# Altium PCB DIOT_EEM_Adapter.pcbdoc (part 1 of 2)
Units mil, origin at the board's own origin, x right, y up, seen from the top; angles counter-clockwise.
Board outline 3439.52 x 3937.01 mil, 6 copper layers (TopLayer, MidLayer1, MidLayer2, SignalLayer1, Internal Plane 1, BottomLayer), stack 60.157 mil thick; 45 components, 66 nets, 409 pads, 76 vias.
Unrouted connection lines stored in the file: 1.
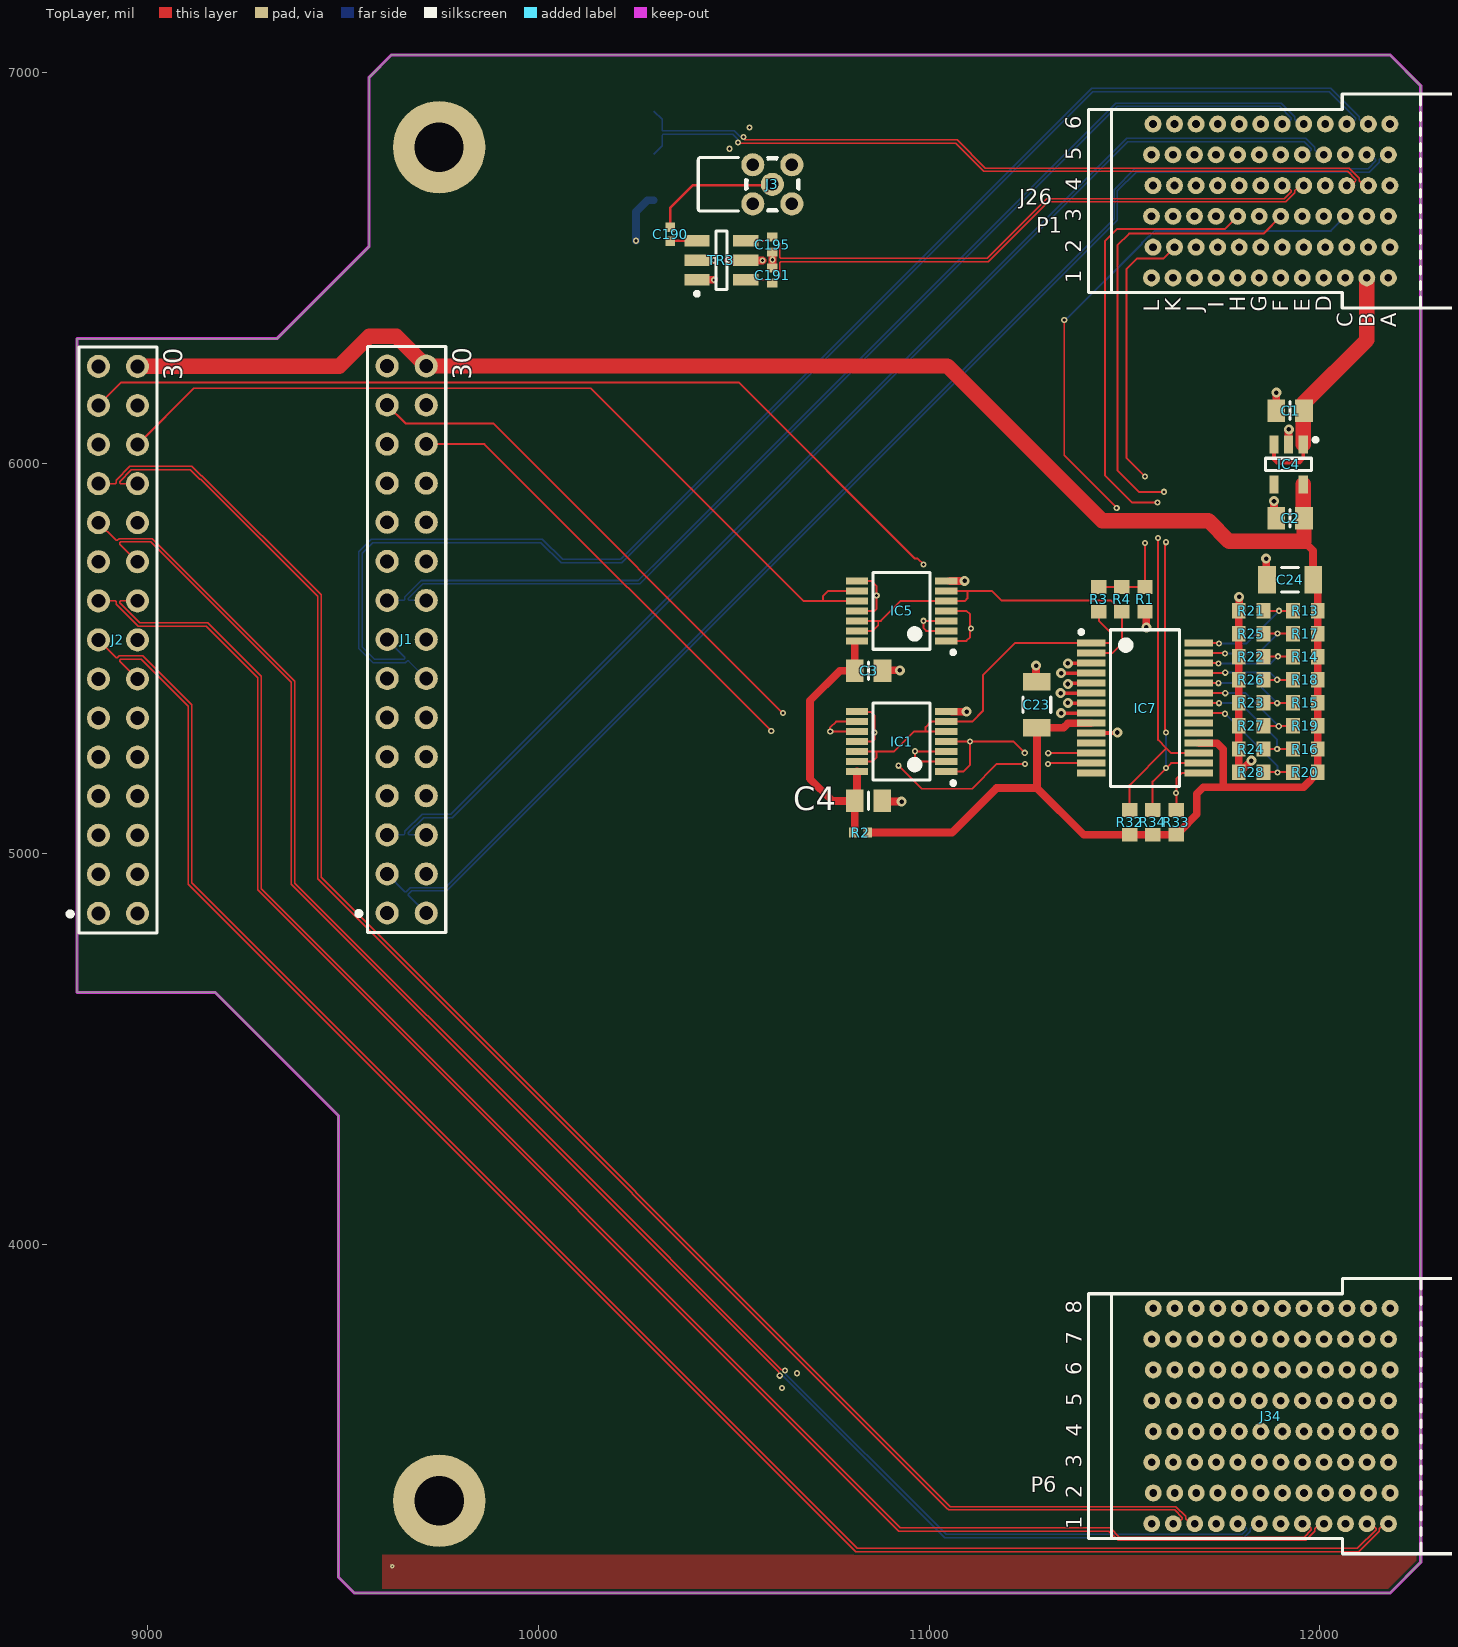
[diagram p0: TopLayer view]
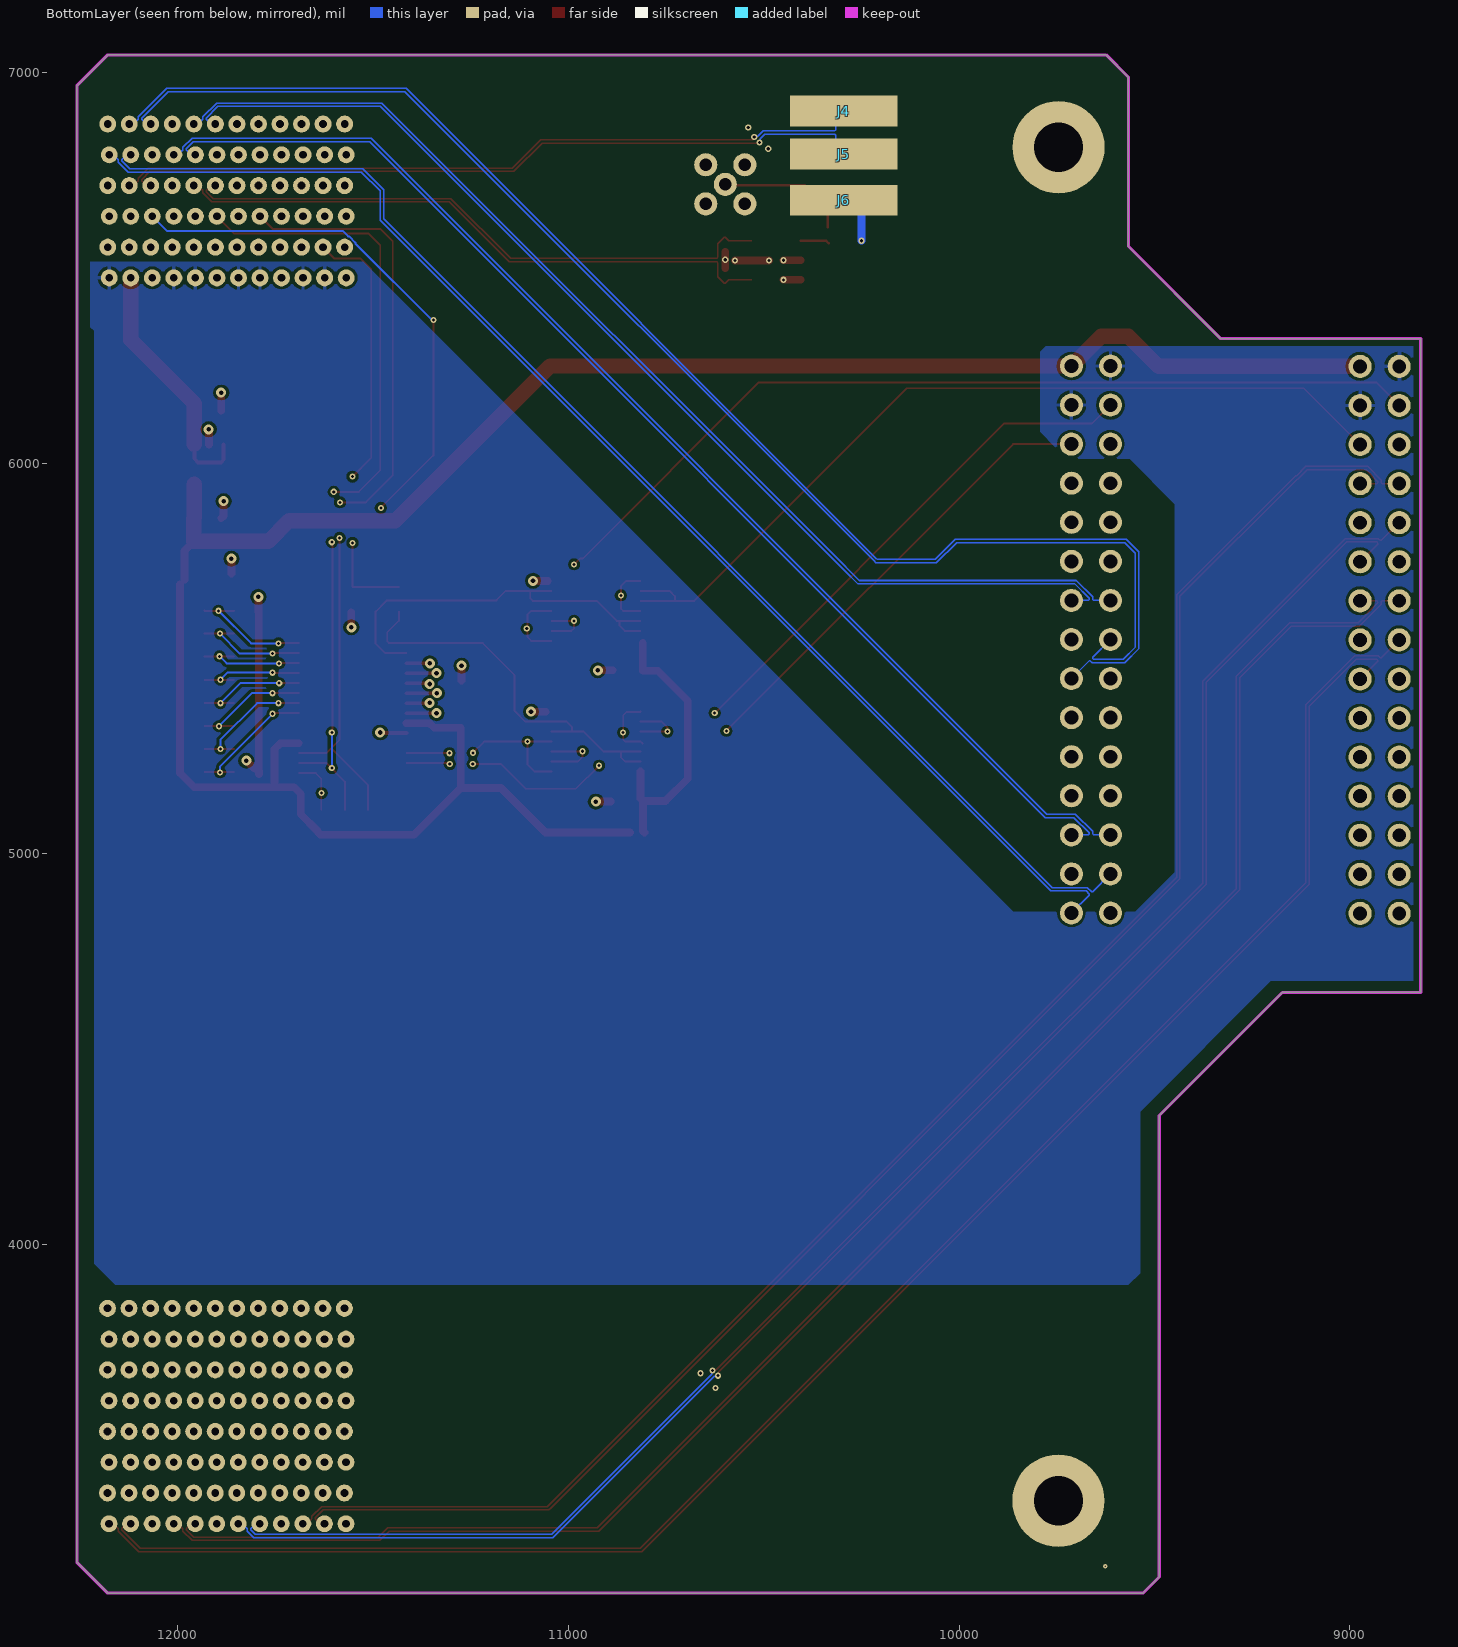
[diagram p1: BottomLayer view, seen from below]
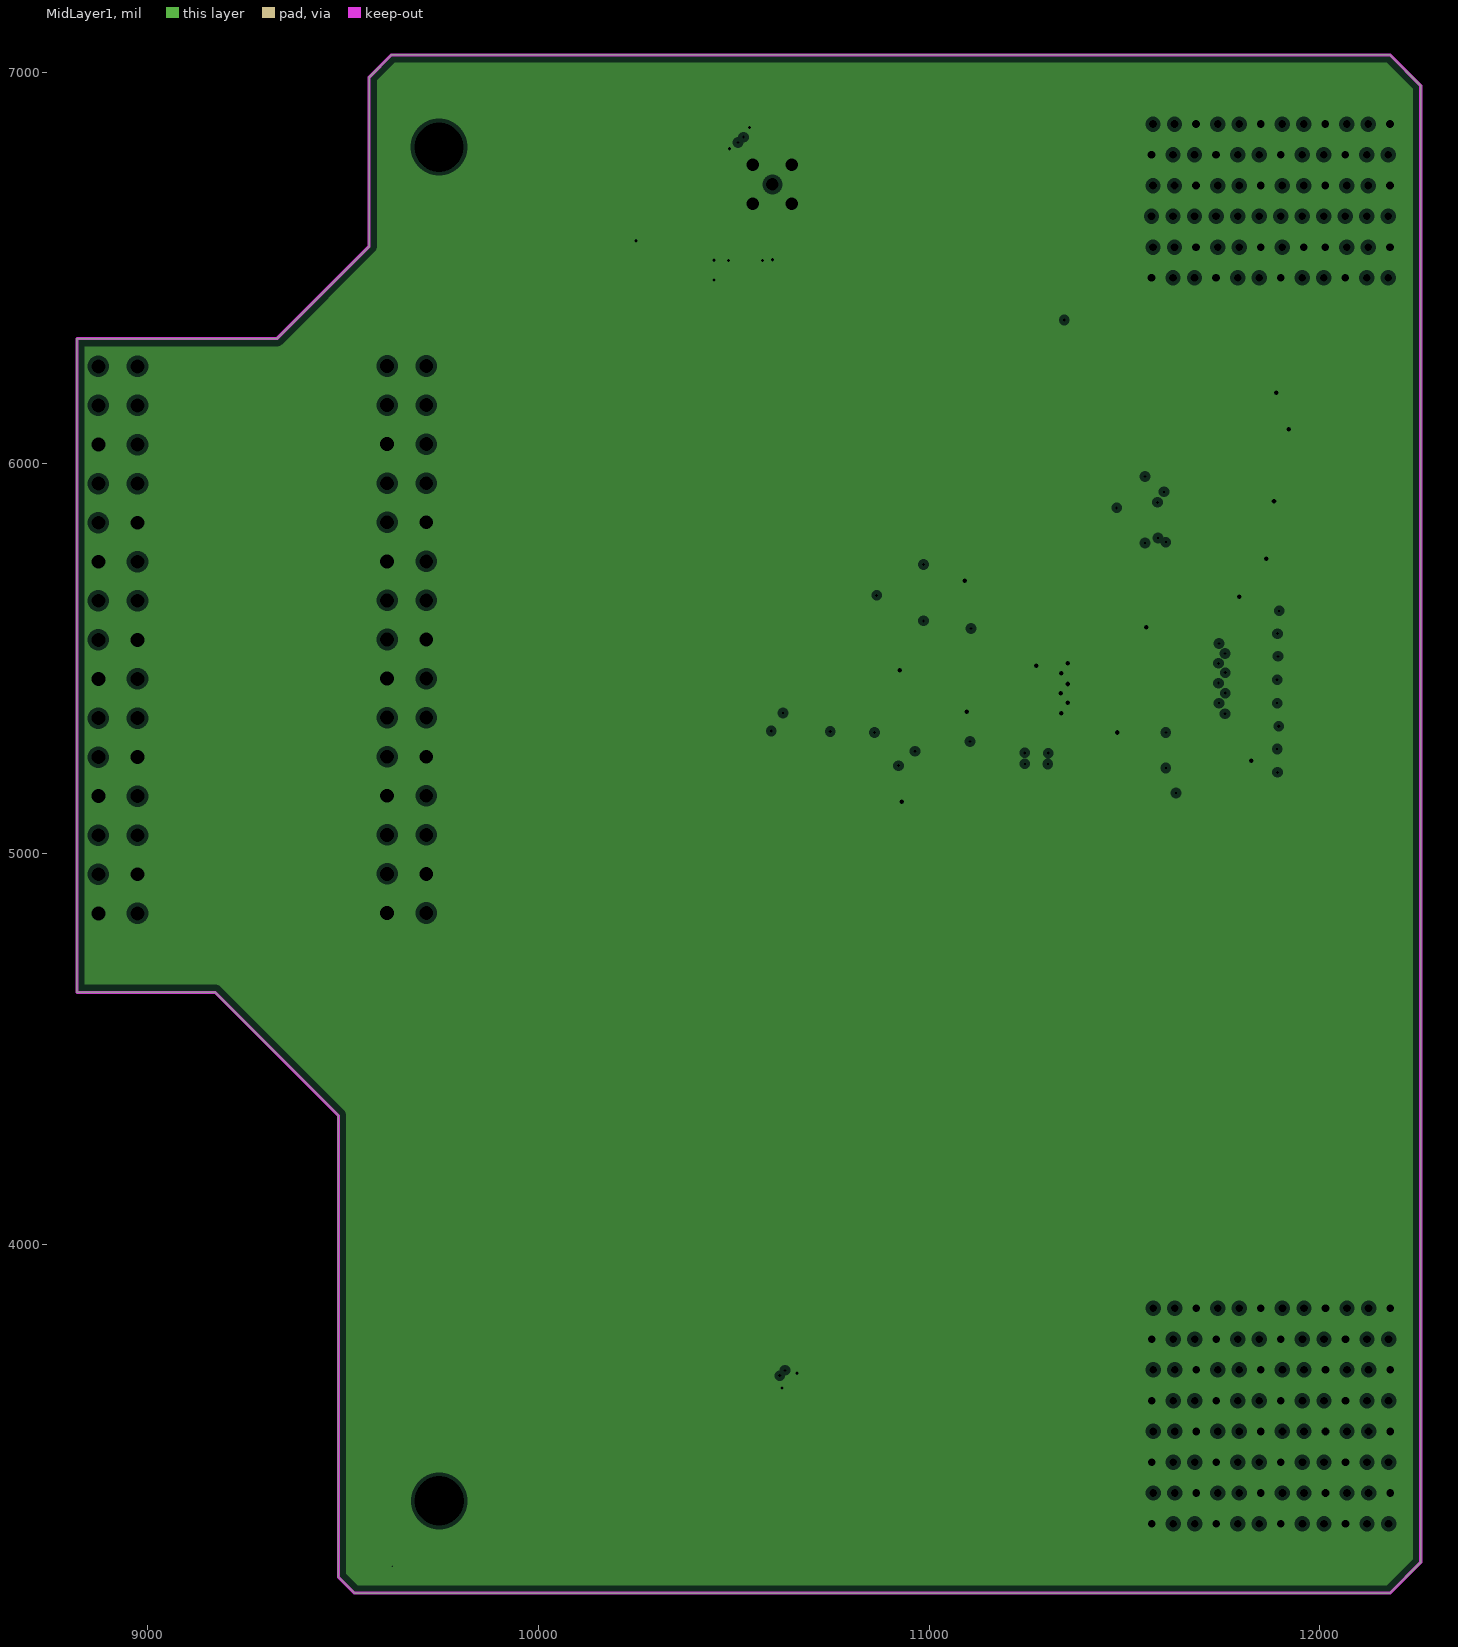
[diagram p2: MidLayer1, clearances drawn from the general rule]
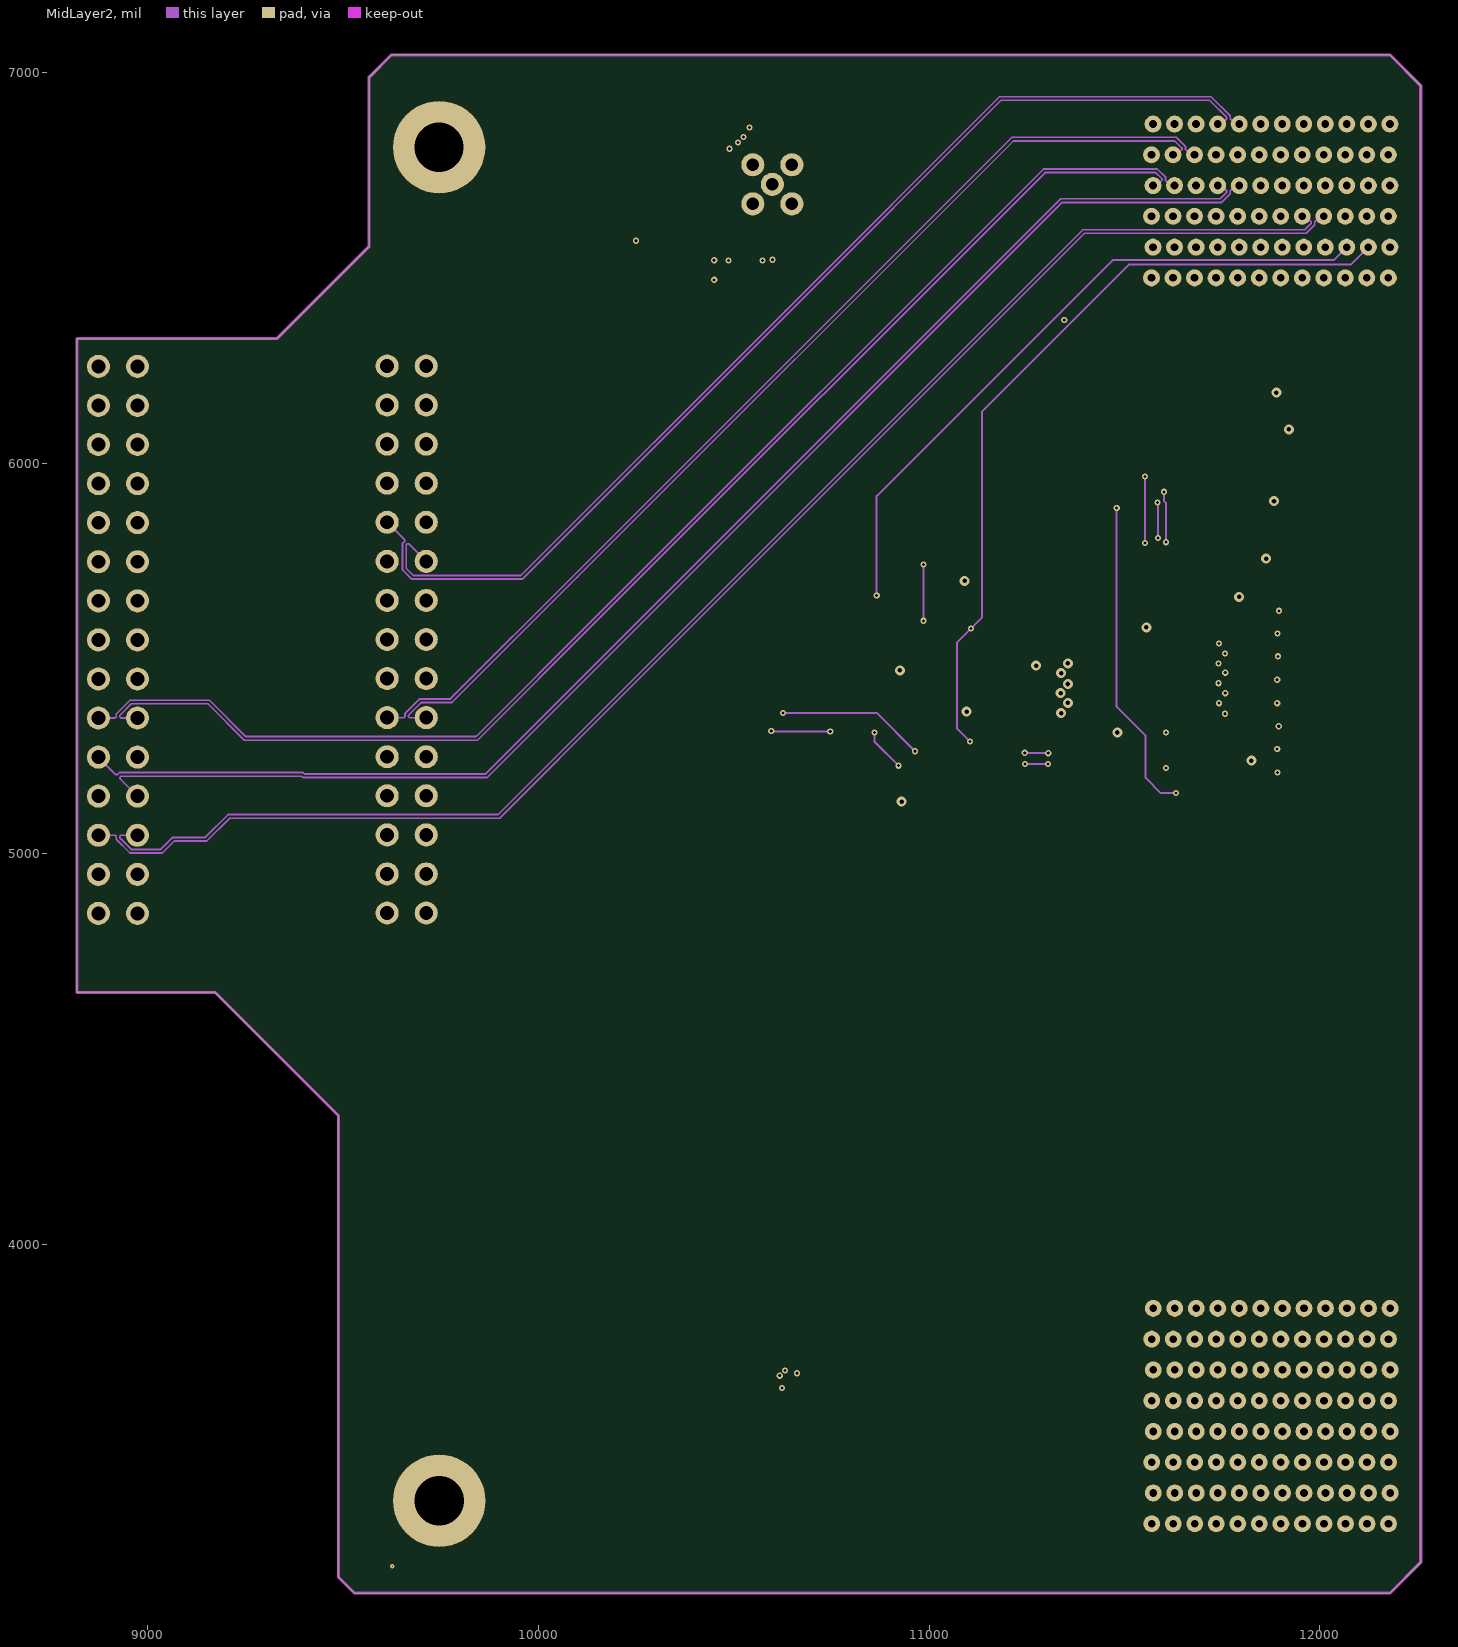
[diagram p3: MidLayer2]
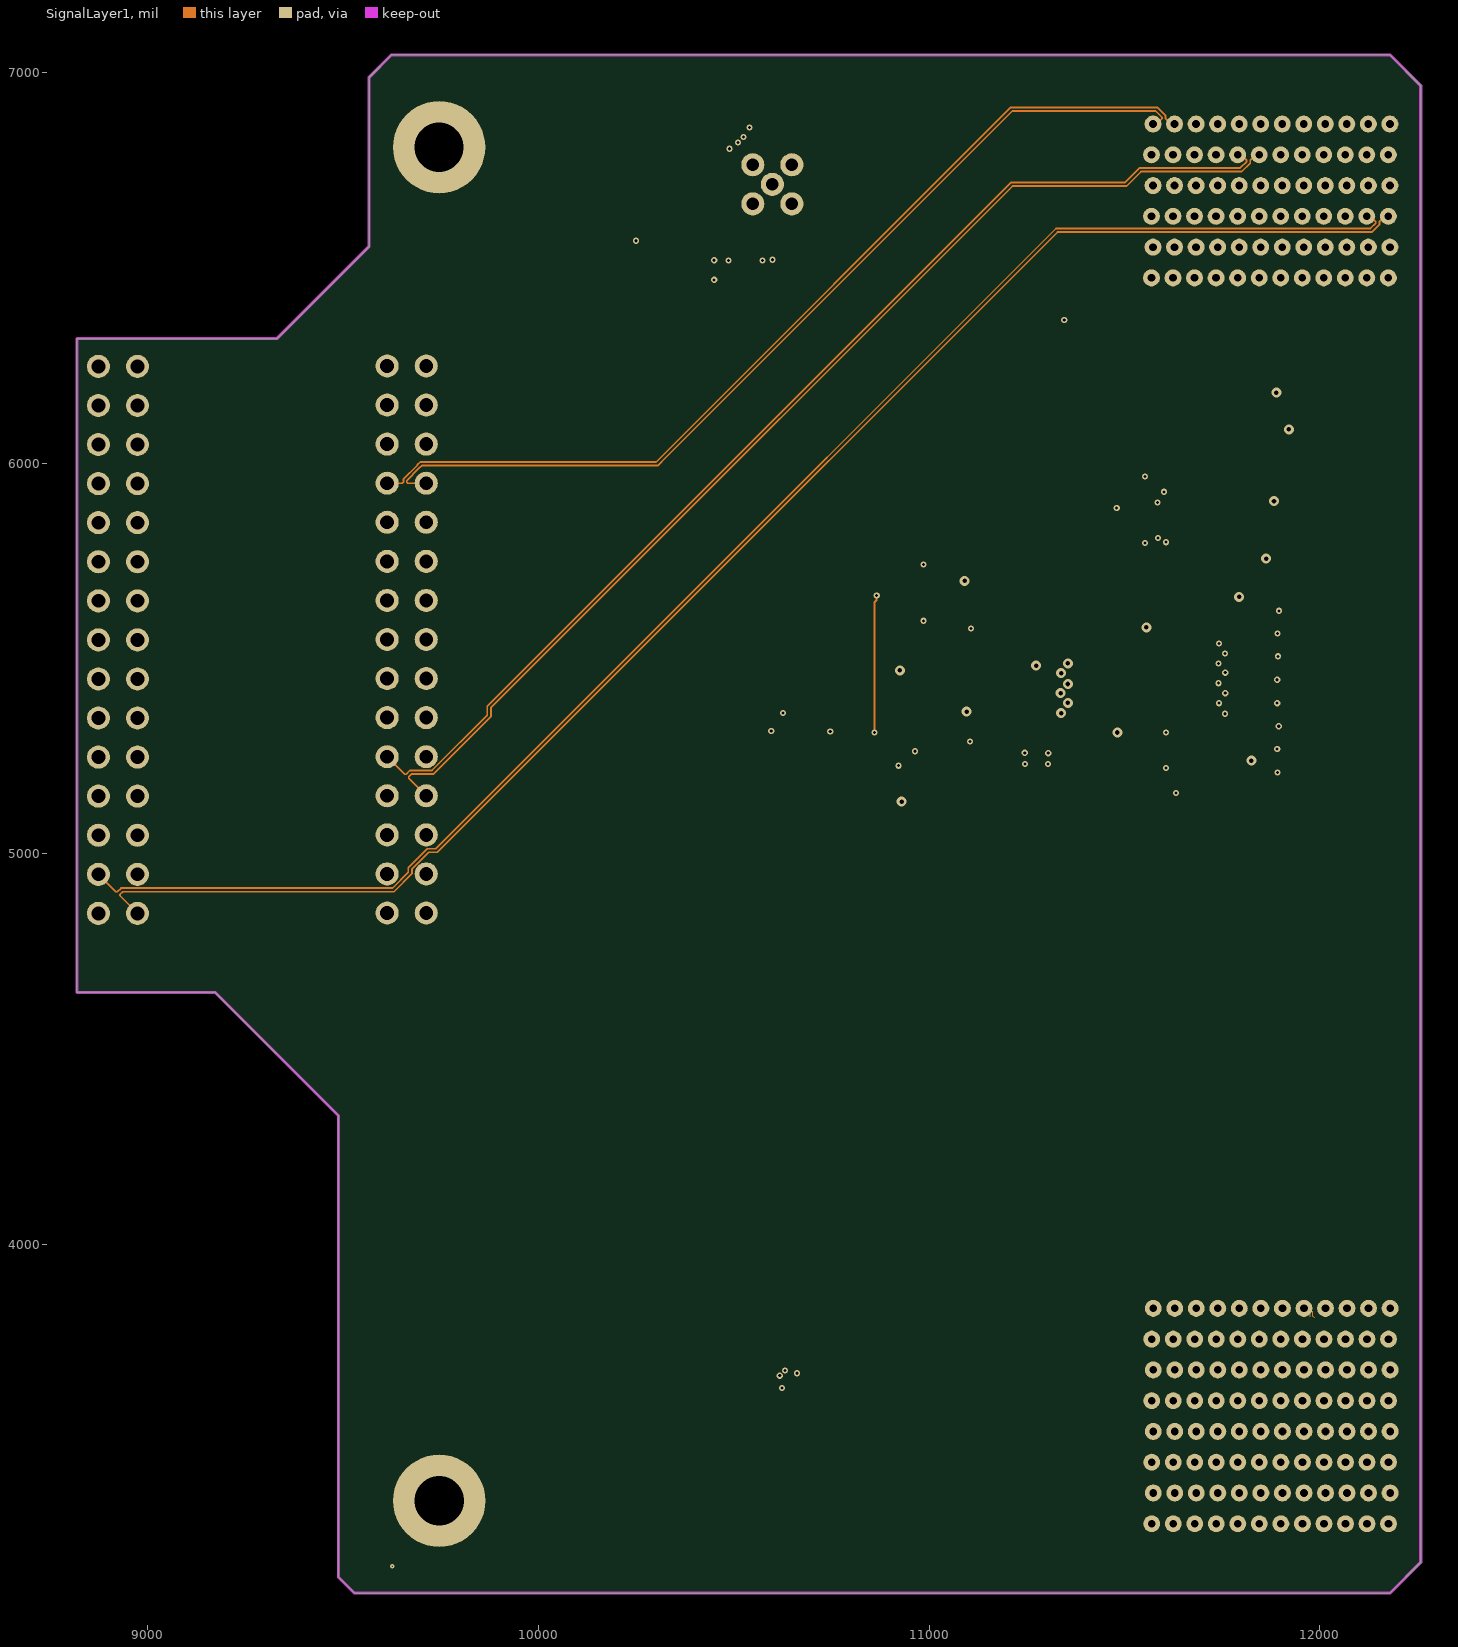
[diagram p4: SignalLayer1]
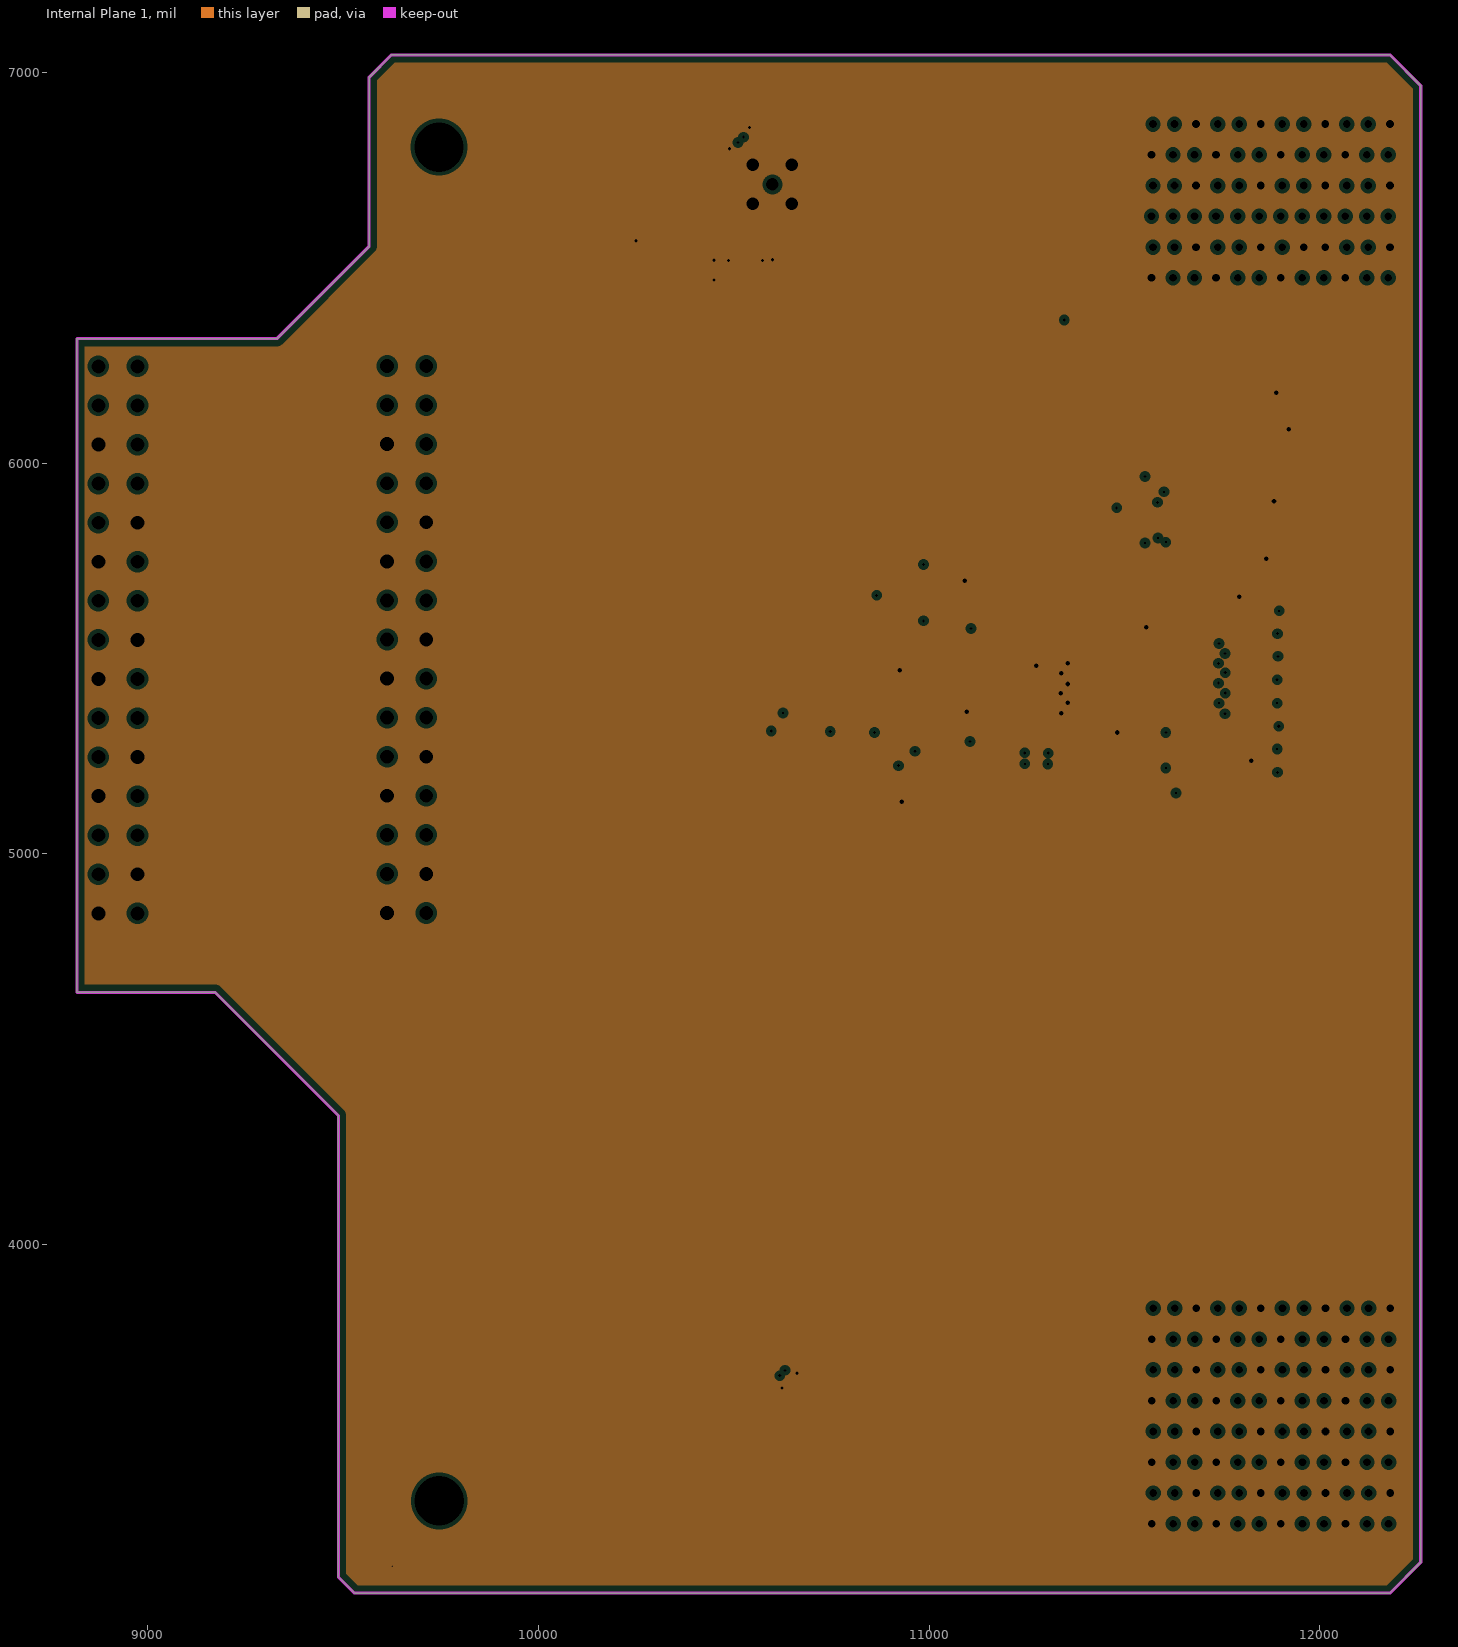
[diagram p5: Internal Plane 1, clearances drawn from the general rule]
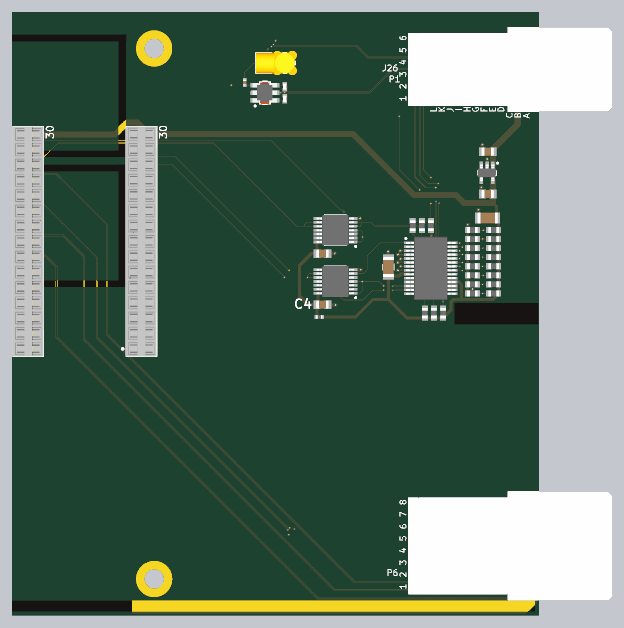
[diagram p7: 3D render of the assembled board from above, using the file's embedded part models]

## Layer stack, top to bottom
TopSolder: solder mask 0.8858, Solder Resist, Dk 3.5
TopLayer: signal copper 2.0865
Dielectric1: core 4.3307, FR-4, Dk 4.2
MidLayer1: plane copper 0.7087, net GND
Dielectric2: prepreg 7.874, FR-4, Dk 4.2
MidLayer2: signal copper 0.7087
Dielectric3: core 28.7402, FR-4, Dk 4.2
SignalLayer1: signal copper 0.7087
Dielectric4: prepreg 7.874, FR-4, Dk 4.2
Internal Plane 1: plane copper 0.7087, net GND
Dielectric5: core 4.3307, FR-4, Dk 4.2
BottomLayer: signal copper 2.0865
BottomSolder: solder mask 0.8858, Solder Resist, Dk 3.5

## Board outline
9173.23,4645.67 9488.19,4330.71 9488.19,3149.61 9529.53,3108.27 12179.69,3108.27 12179.67,3108.27 12258.4,3187 12258.41,3187.01 12258.41,6966.55 12179.69,7045.28 9624.02,7045.28 9566.93,6988.19 9566.93,6555.12 9330.71,6318.9 8818.9,6318.9 8818.9,4645.67

## Design rules (kind name [scope] priority, off if disabled: settings)
Clearance Clearance_NT [InComponent('NT*')] p1: gap=0 ignorepadtopadclearanceinfootprint=TRUE
Clearance Clearance_Poly [InPoly] p2: gap=7.09 ignorepadtopadclearanceinfootprint=FALSE
Clearance [All vs not HasFootprint('Net Tie')] p3: gap=3.54 ignorepadtopadclearanceinfootprint=FALSE except(0: Arc-Hole Track-Hole SMDPad-Hole THPad-Hole Via-Hole Fill-Hole Poly-Hole Region-Hole Text-Hole)
ComponentClearance ComponentClearance_pressfit [HasCompParameterValue('PressFit','Yes') vs InComponent('No Component')] p1: gap=196.85 collisioncheckmode=3 verticalgap=10 showdistances=FALSE
ComponentClearance ComponentClearance_NM [InComponentClass('NotMounted')] p2: gap=0 collisioncheckmode=3 verticalgap=0 showdistances=FALSE
ComponentClearance ComponentClearance_Top [not InComponentClass('Overlapping') and InComponentClass('Top Side Components') vs InComponentClass('Top Side Components')] p3: gap=0 collisioncheckmode=3 verticalgap=100000 showdistances=FALSE
ComponentClearance Overlapping [InComponentClass('Overlapping') vs InComponentClass('Overlapping')] p4: gap=0 collisioncheckmode=3 verticalgap=0 showdistances=FALSE
DiffPairsRouting [InDifferentialPairClass('All Differential Pairs')] p1: maxlimit=7.87 minlimit=3.94 mostfreqgap=4.92 toplayer_mingap=4.92 toplayer_minwidth=3.74 toplayer_maxwidth=4.92 toplayer_prefwidth=3.74 midlayer1_maxgap=4.72 midlayer1_prefgap=4.72 midlayer1_minwidth=3.15 midlayer1_maxwidth=4.53 midlayer1_prefwidth=4.53 midlayer3_maxgap=4.72 midlayer3_prefgap=4.72 midlayer3_minwidth=3.15 midlayer3_maxwidth=4.53 midlayer3_prefwidth=4.53 bottomlayer_mingap=4.92 bottomlayer_minwidth=3.74 bottomlayer_maxwidth=3.94 bottomlayer_prefwidth=3.74 impedanceprofiledriven=TRUE impedanceprofileid={E1CB4566-9A8A-4D03-A74A-23AC336A8A6D} impedanceprofilevalue=100.000000 maxuncoupledlength=1968.5
FabricationTestPointUsage TestPointUsage [All] p1: valid=0 allowmultiple=FALSE
FabricationTestpoint Testpoint [All] p1: side=3 testpointundercomponent=TRUE minsize=40 maxsize=100 preferedsize=60 minholesize=0 maxholesize=40 preferedholesize=32.01 testpointgrid=0.98 allowsidetop=TRUE allowsidebottom=TRUE usegrid=TRUE gridtolerance=0.01
Height [All] p1: minheight=0 maxheight=984.25 prefheight=393.7
HoleSize [All] p1: absolutevalues=TRUE maxlimit=196.85 minlimit=7.87 maxpercent=80.000 minpercent=20.000
HoleToHoleClearance [All] p1: gap=7.87 allowstackedmicrovias=TRUE
Length "Length CPCIs2a + XS" [InNetClass('CPCIs2a') or InxSignalClass('CPCIs2 XS')] p1: maxlimit=4960.63 minlimit=4763.78
Length "Length CPCIs5a + XS" [InNetClass('CPCIs5a')    or InxSignalClass('CPCIs5 XS')] p2: maxlimit=6106.3 minlimit=5944.88
MatchedLengths DiffPair_gbtclkm2c_MatchedLengths [InDifferentialPair ('FMCGBTCLKM2C_C1') Or InDifferentialPair ('FMCGBTCLKM2C_C0')] p1: tolerance=196.85 checknetsindiffpair=FALSE checkdiffpairvsdiffpair=TRUE checkxsignals=TRUE checkothers=TRUE
MatchedLengths DiffPair_gbtxClockDes_MatchedLengths [InDifferentialPair ('GBTXCLOCKDES_N0') Or InDifferentialPair ('GBTXCLOCKDES_P0') Or InDifferentialPair ('GBTXCLOCKDES_N1') Or InDifferentialPair ('GBTXCLOCKDES_P1')Or InDifferentialPair ('GBTXCLOCKDES_N2') Or InDifferentialPair ('GBTXCLOCKDES_P2')Or InDifferentialPair ('GBTXCLOCKDES_N3') Or InDifferentialPair ('GBTXCLOCKDES_P3') Or InDifferentialPair ('GBTXCLOCKDES_N4') Or InDifferentialPair ('GBTXCLOCKDES_P4')] p2: tolerance=196.85 checknetsindiffpair=FALSE checkdiffpairvsdiffpair=TRUE checkxsignals=TRUE checkothers=TRUE
MatchedLengths DiffPair_Scout_ScclkMatchedLengths [InDifferentialPair ('GBTXELINKSSCCLK') Or InDifferentialPair ('GBTXELINKSSCOUT')] p3: tolerance=196.85 checknetsindiffpair=FALSE checkdiffpairvsdiffpair=TRUE checkxsignals=TRUE checkothers=TRUE
MinimumAnnularRing MinimumAnnularRing_Via [IsVia] p1: minimumring=4.72
MinimumAnnularRing [All] p2: minimumring=7.8
MinimumSolderMaskSliver [IsThruPin vs IsThruPin] p1: minsoldermaskwidth=0
NetAntennae [All] p1 off: netantennaetolerance=0
PermittedLayers [All] p1: toplayerpermitted=TRUE bottomlayerpermitted=FALSE
PlaneClearance [All] p1: clearance=9.84
PlaneConnect PlaneConnect_ft_pcbm [InPadClass('ft_pcbm')] p1: planeconnectstyle=Relief reliefexpansion=9.84 reliefentries=4 reliefconductorwidth=7.87 reliefairgap=7.87
PlaneConnect PlaneConnect_Vias [IsVia or InPadClass('Direct')] p2: planeconnectstyle=Direct reliefexpansion=20 reliefentries=4 reliefconductorwidth=10 reliefairgap=10
PlaneConnect "PlaneConnect_0 > 0.5" [AsMM(HoleDiameter)<0.5] p3: planeconnectstyle=Relief reliefexpansion=11.81 reliefentries=4 reliefconductorwidth=7.87 reliefairgap=7.87
PlaneConnect "PlaneConnect_0.5 > 1" [(AsMM(HoleDiameter)>=0.5) and (AsMM(HoleDiameter)<1)] p4: planeconnectstyle=Relief reliefexpansion=11.81 reliefentries=4 reliefconductorwidth=9.84 reliefairgap=7.87
PlaneConnect "PlaneConnect_1 > 1.5" [(AsMM(HoleDiameter)>=1) and (AsMM(HoleDiameter)<1.5)] p5: planeconnectstyle=Relief reliefexpansion=11.81 reliefentries=4 reliefconductorwidth=11.81 reliefairgap=7.87
PlaneConnect "PlaneConnect_1.5 > 2" [(AsMM(HoleDiameter)>=1.5) and (AsMM(HoleDiameter)<2)] p6: planeconnectstyle=Relief reliefexpansion=11.81 reliefentries=4 reliefconductorwidth=15.75 reliefairgap=7.87
PlaneConnect [All] p7: planeconnectstyle=Relief reliefexpansion=11.81 reliefentries=4 reliefconductorwidth=19.68 reliefairgap=7.87
PolygonConnect PolygonConnect_Vias [IsVia or InPadClass('Direct') or InNetClass('ESD_STRIP')] p1: connectstyle=Direct reliefconductorwidth=10 reliefentries=4 polygonreliefangle="90 Angle" airgapwidth=10
PolygonConnect "PolygonConnect_0 > 0.5" [AsMM(HoleDiameter)<0.5] p2: connectstyle=Relief reliefconductorwidth=7.87 reliefentries=4 polygonreliefangle="90 Angle" airgapwidth=7.87
PolygonConnect "PolygonConnect_0.5 > 1" [(AsMM(HoleDiameter)>=0.5) and (AsMM(HoleDiameter)<1)] p3: connectstyle=Relief reliefconductorwidth=9.84 reliefentries=4 polygonreliefangle="90 Angle" airgapwidth=7.87
PolygonConnect "PolygonConnect_1 > 1.5" [(AsMM(HoleDiameter)>=1) and (AsMM(HoleDiameter)<1.5)] p4: connectstyle=Relief reliefconductorwidth=11.81 reliefentries=4 polygonreliefangle="90 Angle" airgapwidth=7.87
PolygonConnect "PolygonConnect_1.5 > 2" [(AsMM(HoleDiameter)>=1.5) and (AsMM(HoleDiameter)<2)] p5: connectstyle=Relief reliefconductorwidth=15.75 reliefentries=4 polygonreliefangle="90 Angle" airgapwidth=7.87
PolygonConnect [All] p6: connectstyle=Relief reliefconductorwidth=19.68 reliefentries=4 polygonreliefangle="90 Angle" airgapwidth=7.87
RoomDefinition U_ID_logic [InComponentClass('U_ID_logic')] p1: confinementstyle=ConfineIn formatcopy=TRUE lockcomponents=FALSE outline 12303,3501 18808,3501 18808,4047 12303,4047
RoomDefinition Cpcis_connectors_P1_P6 [InComponentClass('Cpcis_connectors_P1_P6')] p2: confinementstyle=ConfineIn formatcopy=TRUE lockcomponents=FALSE outline 5892,3531 6483,3531 6483,5893 5892,5893
RoutingVias [All] p1: holewidth=7.87 width=15.75 viastyle="Through Hole" minholewidth=7.87 minwidth=15.75 maxholewidth=19.68 maxwidth=39.37
ShortCircuit ShortCircuit_NT [InComponent('J34') or  InComponent('J31') or InComponent('J30') or InComponent('J29') or InComponent('J33') or InComponent('J26') vs InComponent('NT*')] p1: allowed=TRUE
ShortCircuit [All] p2: allowed=FALSE
SilkToSilkClearance [All] p1: silktosilkclearance=1.97
SilkToSolderMaskClearance [IsPad] p1: minsilkscreentomaskgap=3.15 clearancetoexposedcopper=TRUE
SolderMaskExpansion [All] p1: expansion=0 istentingtop=FALSE
ViasUnderSMD ViasUnderSMD_1 [HasFootprint ('CAPC0603X33N')   or HasFootprint ('RESC1005X40N')  or HasFootprint('CAPC1608X87N')   or HasFootprint('CAPC1005X55N')   or  HasFootprint('Net Tie')] p1: allowed=TRUE
ViasUnderSMD [not InComponentClass('Overlapping')] p2: allowed=FALSE
Width "Schematic Width Constraint_1" [InNet('NetC190_2')] p1: maxlimit=10.03 minlimit=6.39 preferedwidth=10.03 toplayer_maxwidth=6.39 toplayer_prefwidth=6.39 midlayer1_minwidth=10.03 midlayer3_minwidth=10.03 bottomlayer_maxwidth=6.39 bottomlayer_prefwidth=6.39 impedanceprofiledriven=TRUE impedanceprofileid={80641744-4275-49F4-B5CB-D1AA3584BBD0} impedanceprofilevalue=50.000000 minimp=50.000000 maximp=50.000000 favimp=50.000000
Width "Schematic Width Constraint" [InNet('NetC190_1')] p2: maxlimit=10.03 minlimit=6.39 preferedwidth=10.03 toplayer_maxwidth=6.39 toplayer_prefwidth=6.39 midlayer1_minwidth=10.03 midlayer3_minwidth=10.03 bottomlayer_maxwidth=6.39 bottomlayer_prefwidth=6.39 impedanceprofiledriven=TRUE impedanceprofileid={80641744-4275-49F4-B5CB-D1AA3584BBD0} impedanceprofilevalue=50.000000 minimp=50.000000 maximp=50.000000 favimp=50.000000
Width [All] p3: maxlimit=100 minlimit=3.15 preferedwidth=3.94 toplayer_minwidth=3.94 midlayer1_prefwidth=3.15 midlayer3_prefwidth=3.15 bottomlayer_minwidth=3.94 minimp=50.000000 maximp=50.000000 favimp=50.000000
16 further rules are at their usual default settings.

## Classes and differential pairs
net class LVDS: CK_MMCX_IN_N CK_MMCX_IN_P LVDS0_N LVDS0_P LVDS1_N LVDS1_P LVDS2_N LVDS2_P LVDS3_N LVDS3_P LVDS4_N LVDS4_P LVDS5_N LVDS5_P LVDS6_N LVDS6_P LVDS7_N LVDS7_P LVDS8_N LVDS8_P LVDS9_N LVDS9_P LVDS10_N LVDS10_P LVDS11_N LVDS11_P LVDS12_N LVDS12_P LVDS13_N LVDS13_P LVDS14_N LVDS14_P LVDS15_N LVDS15_P USB_N USB_P
component class Cpcis_connectors_P1_P6: C1 C2 C190 C191 C195 IC4 J1 J2 J3 J4 J5 J6 J26 J34 TR3
component class U_ID_logic: C3 C4 C23 C24 IC1 IC5 IC7 R1 R2 R3 R4 R13 R14 R15 R16 R17 R18 R19 R20 R21 R22 R23 R24 R25 R26 R27 R28 R32 R33 R34
differential pair USB: +USB_P -USB_N
differential pair CK_MMCX_IN: +CK_MMCX_IN_P -CK_MMCX_IN_N
differential pair LVDS15: +LVDS15_P -LVDS15_N
differential pair LVDS14: +LVDS14_P -LVDS14_N
differential pair LVDS13: +LVDS13_P -LVDS13_N
differential pair LVDS12: +LVDS12_P -LVDS12_N
differential pair LVDS11: +LVDS11_P -LVDS11_N
differential pair LVDS10: +LVDS10_P -LVDS10_N
differential pair LVDS9: +LVDS9_P -LVDS9_N
differential pair LVDS8: +LVDS8_P -LVDS8_N
differential pair LVDS7: +LVDS7_P -LVDS7_N
differential pair LVDS6: +LVDS6_P -LVDS6_N
differential pair LVDS5: +LVDS5_P -LVDS5_N
differential pair LVDS4: +LVDS4_P -LVDS4_N
differential pair LVDS3: +LVDS3_P -LVDS3_N
differential pair LVDS2: +LVDS2_P -LVDS2_N
differential pair LVDS1: +LVDS1_P -LVDS1_N
differential pair LVDS0: +LVDS0_P -LVDS0_N

## Components (designator, comment, footprint, x,y, rotation, side; value= is the part's Value field where it differs from the comment)
C1 "1uF" CAPC2012X140N 11924.24,6134.84 r0 top
C2 "1uF" CAPC2012X140N 11924.24,5859.25 r0 top
C3 "1uF" CAPC2012X140N 10845.43,5469 r180 top
C4 "1uF" CAPC2012X140N 10845,5136 r180 top
C23 "100nF" CAPC3216X140N 11276,5382 r270 top
C24 "22uF" CAPC3216X180N 11923.95,5701.77 r0 top
C190 "100nF" CAPC1005X55N 10337,6586 r270 top
C191 "0.5pF" CAPC1005X50N 10598.84,6480.64 r270 top
C195 "0.5pF" CAPC1005X50N 10598.84,6559.77 r270 top
IC1 "74HC4066PW" SOP65P640X110-14N 10929.67,5287.8 r180 top
IC4 "NCP703SN33T1G" SOT95P275X110-5N 11920.3,5997.05 r270 top
IC5 "74HC4066PW" SOP65P640X110-14N 10929.67,5622.45 r180 top
IC7 "MCP23017-E/SS" SOP65P780X200-28N 11552.7,5373.22 r0 top
J1 "AMPMODU" TYCO_1-215307-5 9663,5099 r90 top locked
J2 "AMPMODU" TYCO_1-215307-5 8924,5098 r90 top locked
J3 "Coax_1Female_1Shield" HUBER-SUHNER_85_MMCX-50-0-1/111_OE 10598.84,6714 r180 top
J4 "SMD Pad" R700X200 10295.28,6901.64 r0 bottom
J5 "SMD Pad" R700X200 10295.28,6791.34 r0 bottom
J6 "SMD Pad" R700X200 10295.28,6673.23 r0 bottom
J26 "P1" AMPHENOL_10052825-101LF 11874.39,6671.38 r90 top locked
J34 "P6" AMPHENOL_10052838-101LF 11874.88,3561.46 r90 top
R1 "220" RESC1608X55N 11552.62,5651.66 r90 top
R2 "0" RESC1005X40N 10824.5,5055 r180 top
R3 "2k" RESC1608X55N 11434.51,5651.66 r90 top
R4 "2k" RESC1608X55N 11493.57,5651.66 r90 top
R13 "2k" RESC1608X55N 11963.32,5623.03 r0 top
R14 "2k" RESC1608X55N 11963.32,5504.92 r0 top
R15 "2k" RESC1608X55N 11963.32,5386.81 r0 top
R16 "2k" RESC1608X55N 11963.32,5268.7 r0 top
R17 "2k" RESC1608X55N 11963.32,5563.98 r0 top
R18 "2k" RESC1608X55N 11963.32,5445.87 r0 top
R19 "2k" RESC1608X55N 11963.32,5327.76 r0 top
R20 "2k" RESC1608X55N 11963.32,5209.65 r0 top
R21 "2k" RESC1608X55N 11824.21,5623.03 r0 top
R22 "2k" RESC1608X55N 11824.21,5504.92 r0 top
R23 "2k" RESC1608X55N 11824.21,5386.81 r0 top
R24 "2k" RESC1608X55N 11824.21,5268.7 r0 top
R25 "2k" RESC1608X55N 11824.21,5563.98 r0 top
R26 "2k" RESC1608X55N 11824.21,5445.87 r0 top
R27 "2k" RESC1608X55N 11824.21,5327.76 r0 top
R28 "2k" RESC1608X55N 11824.21,5209.65 r0 top
R32 "2k" RESC1608X55N 11513.25,5080.8 r270 top
R33 "2k" RESC1608X55N 11633,5081 r270 top
R34 "2k" RESC1608X55N 11572.31,5080.8 r270 top
TR3 "1:2" XFMR_MINI-CIRCUITS_DB1627 10468.62,6519.64 r90 top

## Footprints (in the part's own frame and the unit in brackets; to place one, negate y for a bottom-side part, rotate by r counter-clockwise, add the part's x,y. Pads: shape width x height; smd on the part's side, far side on the other; paste and mask are expansions set on the pad)
AMPHENOL_10052825-101LF [mm] "72 Contacts, 2mm Pitch, 6 Columns, 4 Pairs per Column, 4 Walls, Right Angle Header"
  round 1.1 hole 0.5: A1(-5,-7.65) A2(-3,-7.75) A3(-1,-7.65) A4(1,-7.75) A5(3,-7.65) A6(5,-7.75) B1(-5,-6.25) B2(-3,-6.35) B3(-1,-6.25) B4(1,-6.35) B5(3,-6.25) B6(5,-6.35) C1(-5,-4.85) C2(-3,-4.95) C3(-1,-4.85) C4(1,-4.95) C5(3,-4.85) C6(5,-4.95) D1(-5,-3.45) D2(-3,-3.55) D3(-1,-3.45) D4(1,-3.55) D5(3,-3.45) D6(5,-3.55) E1(-5,-2.05) E2(-3,-2.15) E3(-1,-2.05) E4(1,-2.15) E5(3,-2.05) E6(5,-2.15) F1(-5,-0.65) F2(-3,-0.75) F3(-1,-0.65) F4(1,-0.75) F5(3,-0.65) F6(5,-0.75) G1(-5,0.75) G2(-3,0.65) G3(-1,0.75) G4(1,0.65) G5(3,0.75) G6(5,0.65) H1(-5,2.15) H2(-3,2.05) H3(-1,2.15) H4(1,2.05) H5(3,2.15) H6(5,2.05) I1(-5,3.55) I2(-3,3.45) I3(-1,3.55) I4(1,3.45) I5(3,3.55) I6(5,3.45) J1(-5,4.95) J2(-3,4.85) J3(-1,4.95) J4(1,4.85) J5(3,4.95) J6(5,4.85) K1(-5,6.35) K2(-3,6.25) K3(-1,6.35) K4(1,6.25) K5(3,6.35) K6(5,6.25) L1(-5,7.75) L2(-3,7.65) L3(-1,7.75) L4(1,7.65) L5(3,7.75) L6(5,7.65)
  silkscreen extent -6.95,-21.95 6.95,11.85, body extent -6.95,-21.95 6.95,11.85, height 15.25
AMPHENOL_10052838-101LF [mm] "96 Contacts, 2mm Pitch, 8 Columns, 4 Pairs per Column, 4 Walls, Right Angle Header"
  round 1.1 hole 0.5: A1(-7,-7.65) A2(-5,-7.75) A3(-3,-7.65) A4(-1,-7.75) A5(1,-7.65) A6(3,-7.75) A7(5,-7.65) A8(7,-7.75) B1(-7,-6.25) B2(-5,-6.35) B3(-3,-6.25) B4(-1,-6.35) B5(1,-6.25) B6(3,-6.35) B7(5,-6.25) B8(7,-6.35) C1(-7,-4.85) C2(-5,-4.95) C3(-3,-4.85) C4(-1,-4.95) C5(1,-4.85) C6(3,-4.95) C7(5,-4.85) C8(7,-4.95) D1(-7,-3.45) D2(-5,-3.55) D3(-3,-3.45) D4(-1,-3.55) D5(1,-3.45) D6(3,-3.55) D7(5,-3.45) D8(7,-3.55) E1(-7,-2.05) E2(-5,-2.15) E3(-3,-2.05) E4(-1,-2.15) E5(1,-2.05) E6(3,-2.15) E7(5,-2.05) E8(7,-2.15) F1(-7,-0.65) F2(-5,-0.75) F3(-3,-0.65) F4(-1,-0.75) F5(1,-0.65) F6(3,-0.75) F7(5,-0.65) F8(7,-0.75) G1(-7,0.75) G2(-5,0.65) G3(-3,0.75) G4(-1,0.65) G5(1,0.75) G6(3,0.65) G7(5,0.75) G8(7,0.65) H1(-7,2.15) H2(-5,2.05) H3(-3,2.15) H4(-1,2.05) H5(1,2.15) H6(3,2.05) H7(5,2.15) H8(7,2.05) I1(-7,3.55) I2(-5,3.45) I3(-3,3.55) I4(-1,3.45) I5(1,3.55) I6(3,3.45) I7(5,3.55) I8(7,3.45) J1(-7,4.95) J2(-5,4.85) J3(-3,4.95) J4(-1,4.85) J5(1,4.95) J6(3,4.85) J7(5,4.95) J8(7,4.85) K1(-7,6.35) K2(-5,6.25) K3(-3,6.35) K4(-1,6.25) K5(1,6.35) K6(3,6.25) K7(5,6.35) K8(7,6.25) L1(-7,7.75) L2(-5,7.65) L3(-3,7.75) L4(-1,7.65) L5(1,7.75) L6(3,7.65) L7(5,7.75) L8(7,7.65)
  silkscreen extent -8.95,-21.95 8.95,11.85, body extent -8.96,-21.95 8.94,11.85, height 15.25
CAPC1005X50N [mm] "Chip Capacitor, Body 1.0x0.55mm, IPC Medium Density"
  rect 0.57x0.68 smd: 1(-0.49,0) 2(0.49,0)
  body extent -0.5,-0.27 0.5,0.28, height 0.5
CAPC1005X55N [mm] "Capacitor, Non-Polarized, Chip; 1.00mm L X 0.50mm W X 0.70mm H, IPC Medium Density"
  rect 0.62x0.62 smd: 1(-0.45,0) 2(0.45,0)
  body extent -0.52,-0.27 0.53,0.28, height 0.55
CAPC2012X140N [mm] "Chip Capacitor, Body 2.0x1.25mm, IPC Medium Density"
  rect 1.15x1.45 smd: 1(-0.9,0) 2(0.9,0)
  silkscreen extent 0,-0.58 0,0.58, body extent -1.05,-0.67 1.05,0.68, height 1.3
CAPC3216X140N [mm] "Chip Capacitor, Body 3.2x1.6mm, IPC Medium Density"
  rect 1.15x1.8 smd: 1(-1.5,0) 2(1.5,0)
  silkscreen extent -0.5,-0.9 0.5,0.9, body extent -1.7,-0.9 1.7,0.9, height 1.4
CAPC3216X180N [mm] "Chip Capacitor, Body 3.2x1.6mm, IPC Medium Density"
  rect 1.15x1.8 smd: 1(-1.5,0) 2(1.5,0)
  silkscreen extent -0.55,-0.8 0.55,0.8, body extent -1.7,-0.9 1.7,0.9, height 1.8
HUBER-SUHNER_85_MMCX-50-0-1/111_OE [mm] "MMCX 50 Ohm Right Angle PCB Jack"
  round 1.5 hole 0.8: 1(0,0) 2(-1.27,1.27) 2(-1.27,-1.27) 2(1.27,1.27) 2(1.27,-1.27)
  silkscreen extent -1.73,-1.74 4.82,1.74, body extent -1.73,-1.74 4.82,1.74, height 3.8
R700X200 [mm] "7mm x  2mm SMD Pad"
  rect 7x2 smd paste-1: 1(0,0)
RESC1005X40N [mm] "Chip Resistor, EIA 0402, Metric 1005, Body 1.0x0.5mm, IPC Medium Density"
  rect 0.58x0.62 smd: 1(-0.47,0) 2(0.47,0)
  body extent -0.52,-0.27 0.53,0.28, height 0.4
RESC1608X55N [mm] "Chip Resistor, EIA 0603, Metric 1608, Body 1.6x0.8mm, IPC Medium Density"
  rect 0.9x1 smd: 1(-0.8,0) 2(0.8,0)
  body extent -0.87,-0.47 0.88,0.48, height 0.55
SOP65P640X110-14N [mm] "SOP, 14-Leads, Body 4.4x5mm (max), Pitch 0.65mm, IPC Medium Density"
  rect 1.45x0.45 smd: 1(-2.9,1.95) 2(-2.9,1.3) 3(-2.9,0.65) 4(-2.9,0) 5(-2.9,-0.65) 6(-2.9,-1.3) 7(-2.9,-1.95) 8(2.9,-1.95) 9(2.9,-1.3) 10(2.9,-0.65) 11(2.9,0) 12(2.9,0.65) 13(2.9,1.3) 14(2.9,1.95)
  silkscreen extent -3.48,-2.5 1.85,2.82, body extent -3.12,-2.55 3.12,2.55, height 1.1
SOP65P780X200-28N [mm] "SOP, 0.65mm Pitch; 28 Pin, 5.30mm W X 10.20mm L X 2.00mm H Body, IPC Medium Density"
  rect 1.85x0.45 smd: 1(-3.5,4.225) 2(-3.5,3.575) 3(-3.5,2.925) 4(-3.5,2.275) 5(-3.5,1.625) 6(-3.5,0.975) 7(-3.5,0.325) 8(-3.5,-0.325) 9(-3.5,-0.975) 10(-3.5,-1.625) 11(-3.5,-2.275) 12(-3.5,-2.925) 13(-3.5,-3.575) 14(-3.5,-4.225) 15(3.5,-4.225) 16(3.5,-3.575) 17(3.5,-2.925) 18(3.5,-2.275) 19(3.5,-1.625) 20(3.5,-0.975) 21(3.5,-0.325) 22(3.5,0.325) 23(3.5,0.975) 24(3.5,1.625) 25(3.5,2.275) 26(3.5,2.925) 27(3.5,3.575) 28(3.5,4.225)
  silkscreen extent -4.27,-5.1 2.25,5.1, body extent -4.11,-5.25 4.11,5.25, height 2
SOT95P275X110-5N [mm] "SOT, 0.95mm Pitch; 5 Pin, 1.50mm W X 3.00mm L X 1.10mm H Body, IPC Medium Density"
  rect 1.15x0.6 smd: 1(-1.3,0.95) 2(-1.3,0) 3(-1.3,-0.95) 4(1.3,-0.95) 5(1.3,0.95)
  silkscreen extent -1.72,-1.5 0.4,1.87, body extent -1.37,-1.5 1.38,1.5, height 1.1
TYCO_1-215307-5 [mm] "30 Contacts - Pitch 2.54mm - Dual Row Top Entry Socket"
  round 1.5 hole 0.9: 1(-6.35,1.27) 2(-6.35,-1.27) 3(-3.81,1.27) 4(-3.81,-1.27) 5(-1.27,1.27) 6(-1.27,-1.27) 7(1.27,1.27) 8(1.27,-1.27) 9(3.81,1.27) 10(3.81,-1.27) 11(6.35,1.27) 12(6.35,-1.27)
  round 1.5 hole 0.9 unplated: 13(8.89,1.27) 14(8.89,-1.27) 15(11.43,1.27) 16(11.43,-1.27) 17(13.97,1.27) 18(13.97,-1.27) 19(16.51,1.27) 20(16.51,-1.27) 21(19.05,1.27) 22(19.05,-1.27) 23(21.59,1.27) 24(21.59,-1.27) 25(24.13,1.27) 26(24.13,-1.27) 27(26.67,1.27) 28(26.67,-1.27) 29(29.21,1.27) 30(29.21,-1.27)
  silkscreen extent -7.62,-2.54 30.48,3.26, body extent -7.62,-2.53 30.48,2.53, height 7.01
XFMR_MINI-CIRCUITS_DB1627 [mm] "MINI-CIRCUITS RF Transformer, Case DB1627 - Body 4.06X3.81mm"
  rect 0.76x1.65 smd: 1(-1.27,1.59) 2(0,1.59) 3(1.27,1.59) 4(1.27,-1.59) 5(0,-1.59) 6(-1.27,-1.59)
  silkscreen extent -2.3,-0.37 1.91,1.72, body extent -1.9,-2.03 1.91,2.03, height 4.06

## Part data
C1 C2 C3 C4: library part CC0805_1UF_35V_20%_X7R, "Non-polarised capacitor", Case=0805, Manufacturer=GENERIC, Manufacturer1 ComponentHeight=1.35mm, Manufacturer1 Example="TAIYO YUDEN", Manufacturer1 Part Number=GMK212B7105MG-T, Tolerance=±20%, Voltage=35V, Author="CERN DEM JLC", Component Type=Standard, CreateDate=22.06.2011, HelpURL=\\cern.ch\dfs\Applications\Altium\Datasheets\CC0805_X7R_TAIYO-YUDEN_HIGH-VALUE.pdf, LatestRevisionDate=22.06.2011, Manufacturer Part Number=CC0805_1UF_35V_20%_X7R, Mounted=Yes, Part Description="SMD Multilayer Chip Ceramic Capacitor", Part Number=CC0805_1UF_35V_20%_X7R, Pin Count=2, Sense=No, SMD=Yes, Socket=No, Status="Not Recommended", TC=X7R
C23: library part CC1206_100NF_50V_10%_X7R, "Non-polarised capacitor", Case=1206, Manufacturer=GENERIC, Manufacturer1 ComponentHeight=1.7mm, Manufacturer1 Example="VISHAY VITRAMON", Manufacturer1 Part Number=VJ1206Y104KXAAT, Tolerance=±10%, Voltage=50V, Author="CERN DEM JLC", Component Type=Standard, CreateDate=03/12/2007, HelpURL=\\cern.ch\dfs\Applications\Altium\Datasheets\CC1206_X7R_VISHAY_VJ.pdf, LatestRevisionDate=03/12/2007, Manufacturer Part Number=CC1206_100NF_50V_10%_X7R, Mounted=Yes, Part Description="SMD Multilayer Chip Ceramic Capacitor", Part Number=CC1206_100NF_50V_10%_X7R, Pin Count=2, Sense=No, SMD=Yes, Socket=No, Status=Preferred, TC=X7R
C24: library part CC1206_22UF_35V_20%_JB_TDK_C3216JB1V226M160AC, "Non-polarised capacitor", Case=1206, Manufacturer=TDK, Manufacturer Part Number=C3216JB1V226M160AC, Tolerance=±20%, Voltage=35V, Author="CERN DEM JLC", ComponentHeight=1.8mm, Component Type=Standard, CreateDate=13/07/2017, HelpURL=\\cern.ch\dfs\Applications\Altium\Datasheets\CC1206_TDK_C3216JB1V226M160AC.pdf, LatestRevisionDate=13/07/2017, Mounted=Yes, Part Description="SMD Multilayer Chip Ceramic Capacitor", Part Number=CC1206_22UF_35V_20%_JB_TDK_C3216JB1V226M160AC, Pin Count=2, Sense=No, SMD=Yes, Socket=No, Status=None, TC=JB(±10%)
C190: library part CC0402_100NF_16V_10%_X5R, "Non-polarised capacitor", Case=0402, Manufacturer=GENERIC, Manufacturer1 ComponentHeight=0.55mm, Manufacturer1 Example=MURATA, Manufacturer1 Part Number=GRM155R61C104KA88D, Tolerance=±10%, Voltage=16V, Author="CERN DEM JLC", Component Type=Standard, CreateDate=10.12.2013, HelpURL=\\cern.ch\dfs\Applications\Altium\Datasheets\CC0402_X5R_MURATA_GRM.pdf, LatestRevisionDate=10.12.2013, Manufacturer Part Number=CC0402_100NF_16V_10%_X5R, Mounted=Yes, Part Description="SMD Multilayer Chip Ceramic Capacitor", Part Number=CC0402_100NF_16V_10%_X5R, Pin Count=2, Sense=No, SMD=Yes, Socket=No, Status=None, TC=X5R
C191 C195: library part CC0402_0.5PF_25V_0.05PF_AVX_04023J0R5ABSTR, "Non-polarised capacitor", Case=0402, Manufacturer=AVX, Manufacturer Part Number=04023J0R5ABSTR, Tolerance=±0.05pF, Voltage=25V, Author="CERN DEM JLC", ComponentHeight=0.5mm, Component Type=Standard, CreateDate=2017-02-22, HelpURL=\\cern.ch\dfs\Applications\Altium\Datasheets\CC0402_AVX_ACCU-P.pdf, LatestRevisionDate=2017-02-22, Mounted=Yes, Part Description="Thin-Film Chip Capacitors for RF Signal and Power Applications, Accu-P Series", Part Number=CC0402_0.5PF_25V_0.05PF_AVX_04023J0R5ABSTR, Pin Count=2, Sense=No, SMD=Yes, Socket=No, Status=None
IC1 IC5: Case=TSSOP14, Manufacturer="NXP SEMICONDUCTORS", Author="CERN DEM JLC", Bonding=No, ComponentHeight=1.1mm, Component Type=Standard, CreateDate=19.11.2014, Device=74HC4066PW, HelpURL=\\cern.ch\dfs\Applications\Altium\Datasheets\74HC4066PW.pdf, LatestRevisionDate=19.11.2014, Manufacturer Part Number=74HC4066PW, Mounted=Yes, PackageDescription="SOP, 14-Leads, Body 4.4x5mm (max), Pitch 0.65mm, IPC Medium Density", Part Description="Quad Single-Pole Single-Throw Analog Switch", Part Number=74HC4066PW, Pin Count=14, PressFit=No, Sense=No, SMD=Yes, Socket=No
IC4: "3.3V 300mA, Ultra-Low Quiescent Current, IQ 12uA, Ultra-Low Noise, LDO Voltage Regulator", Case=SOT23-5, Manufacturer="ON SEMICONDUCTOR", Author="CERN DEM JLC", Bonding=No, ComponentHeight=1.1mm, Component Type=Standard, CreateDate=16.02.2017, Device=NCP703SN33T1G, HelpURL=\\cern.ch\dfs\Applications\Altium\Datasheets\NCP703SN33T1G.pdf, LatestRevisionDate=16.02.2017, Manufacturer Part Number=NCP703SN33T1G, Mounted=Yes, PackageDescription="SOT, 0.95mm Pitch; 5 Pin, 1.50mm W X 3.00mm L X 1.10mm H Body, IPC Medium Density", Part Description="3.3V 300mA, Ultra-Low Quiescent Current, IQ 12uA, Ultra-Low Noise, LDO Voltage Regulator", Part Number=NCP703SN33T1G, Pin Count=5, PressFit=No, Sense=No, SMD=Yes, Socket=No
IC7: "16-bit I/O Port Expander With Serial Interface", Case=SSOP28, Manufacturer="MICROCHIP TECHNOLOGY", Author="CERN DEM JLC", Bonding=No, ComponentHeight=2mm, Component Type=Standard, CreateDate=17/01/2011, Device=MCP23017-E/SS, HelpURL=\\cern.ch\dfs\Applications\Altium\Datasheets\MCP23017-E-SS.pdf, LatestRevisionDate=17/01/2011, Manufacturer Part Number=MCP23017-E/SS, Mounted=Yes, PackageDescription="SOP, 0.65mm Pitch; 28 pin, 5.30mm W X 10.20mm L X 2.00mm H body, IPC Medium Density", Part Description="16-bit I/O Port Expander With Serial Interface", Part Number=MCP23017-E/SS, Pin Count=28, PressFit=No, Sense=No, SMD=Yes, Socket=No
J1 J2: "Connector 2.54mm, 30 pin female, vertical, 7mm, AMPMODU HV-100/HV-190", Manufacturer="TYCO ELECTRONICS", Manufacturer Part Number=1-215307-5, Part Number=TYCO_1-215307-5, Author=GK, ComponentHeight=22.86mm, Component Type=Standard, CreateDate=05.10.2015, Family=AMPMODU, HelpURL=\\cern.ch\dfs\Applications\Altium\Datasheets\TYCO_3-1761606-1.pdf, LatestRevisionDate=05.10.2015, Mounted=Yes, Part Description="34 Contacts, Dual Row Vertical Low Profile IDC Shrouded Header, with Long Eject Latch", Pin Count=30, PressFit=No, Sense=No, SMD=No, Socket=No, Status=None
J3: library part HUBER-SUHNER_85_MMCX-50-0-1/111_OE, Manufacturer=HUBER+SUHNER, Manufacturer Part Number=85_MMCX-50-0-1/111_OE, Author="CERN DEM JLC", ComponentHeight=9.6mm, Component Type=Standard, CreateDate=06.11.2014, Family=MMCX, HelpURL=\\cern.ch\dfs\Applications\Altium\Datasheets\HUBER-SUHNER_85_MMCX-50-0-1-111_OE.pdf, LatestRevisionDate=06.11.2014, Mounted=Yes, Part Description="MMCX 50 Ohms Right Angle PCB Jack", Part Number=HUBER-SUHNER_85_MMCX-50-0-1/111_OE, Pin Count=2, PressFit=No, Sense=No, SMD=No, Socket=No, Status=None
J4 J5 J6: library part TEST1_CompoKind, "Single SMD Pad Standard", Author="CERN DEM MR", ComponentHeight=0mm, Component Type=Standard, CreateDate=26.03.2019, Family="SMD Pad", HelpURL=Undefined, LatestRevisionDate=26.03.2019, Mounted=No, PackageDescription="7mm x  2mm SMD Pad", Part Description="7mm x 2mm SMD Pad", Part Number=TEST1_CompoKind, Pin Count=1, Sense=No, SMD=No, Socket=No, Status=None
J26: library part AMPHENOL_10052825-101LF, "72 Contacts Header, 6 Columns, 4 Pairs per Column", Manufacturer=AMPHENOL, Manufacturer Part Number=10052825-101LF, Author="CERN DEM MR", ClassName=Overlapping, ComponentHeight=15.35mm, ComponentLink1Description=Application, ComponentLink1URL=\\cern.ch\dfs\Applications\Altium\Datasheets\AMPHENOL_10052825-101LF_Application.pdf, Component Type=Standard, CreateDate=19/02/2018, Family="AirMax VS", HelpURL=\\cern.ch\dfs\Applications\Altium\Datasheets\AMPHENOL_10052825-101LF.pdf, LatestRevisionDate=19/02/2018, Mounted=Yes, Part Description="72 Contacts, 2mm Pitch, 6 Columns, 4 Pairs per Column, 4 Walls, Right Angle Header", Part Number=AMPHENOL_10052825-101LF, Pin Count=72, PressFit=Yes, Sense=No, SMD=No, Socket=No, Status=None
J34: library part AMPHENOL_10052838-101LF, "96 Contacts Header, 8 Columns, 4 Pairs per Column", Manufacturer=AMPHENOL, Manufacturer Part Number=10052838-101LF, Author="CERN DEM MR", ClassName=Overlapping, ComponentHeight=15.35mm, ComponentLink1Description=Application, ComponentLink1URL=\\cern.ch\dfs\Applications\Altium\Datasheets\AMPHENOL_10052838-101LF_Application.pdf, Component Type=Standard, CreateDate=19/02/2018, Family="AirMax VS", HelpURL=\\cern.ch\dfs\Applications\Altium\Datasheets\AMPHENOL_10052838-101LF.pdf, LatestRevisionDate=19/02/2018, Mounted=Yes, Part Description="96 Contacts, 2mm Pitch, 8 Columns, 4 Pairs per Column, 4 Walls, Right Angle Header", Part Number=AMPHENOL_10052838-101LF, Pin Count=96, PressFit=Yes, Sense=No, SMD=No, Socket=No, Status=None
R1: library part R0603_220R_1%_0.1W_100PPM, "Resistor - 1%", Case=0603, Manufacturer=GENERIC, Manufacturer1 ComponentHeight=0.55mm, Manufacturer1 Example="NIC COMPONENT", Manufacturer1 Part Number=NRC06F2200TRF, Power=0.1W, Tolerance=±1%, Author="CERN DEM JLC", Component Type=Standard, CreateDate=03.12.2007, HelpURL=\\cern.ch\dfs\Applications\Altium\Datasheets\R0603_NIC_NRC.pdf, LatestRevisionDate=13.03.2008, Manufacturer Part Number=R0603_220R_1%_0.1W_100PPM, Mounted=Yes, Part Description="General Purpose Thick Film Chip Resistor", Part Number=R0603_220R_1%_0.1W_100PPM, Pin Count=2, PressFit=No, Sense=No, SMD=Yes, Socket=No, Status=Preferred, TC=±100ppm/°C
R2: library part R0402_0R_JUMPER, "Resistor", Case=0402, Manufacturer=GENERIC, Manufacturer1 ComponentHeight=0.4mm, Manufacturer1 Example="YAGEO PHYCOMP", Manufacturer1 Part Number=232270591001L, Author="CERN DEM JLC", Component Type=Standard, CreateDate=03.12.2007, HelpURL=\\cern.ch\dfs\Applications\Altium\Datasheets\R0402_Phycomp_RC0402.pdf, LatestRevisionDate=17.10.2012, Manufacturer Part Number=R0402_0R_JUMPER, Mounted=Yes, Part Description="1A (0.05R Max DC Resistance) Zero Ohm Jumper", Part Number=R0402_0R_JUMPER, Pin Count=2, PressFit=No, Sense=No, SMD=Yes, Socket=No, Status="Not Recommended"
R3 R4 R13 R14 R15 R16 R17 R18 R19 R20 R21 R22 R23 R24 R25 R26 R27 R28 R32 R33 R34: library part R0603_2K_1%_0.1W_100PPM, "Resistor - 1%", Case=0603, Manufacturer=GENERIC, Manufacturer1 ComponentHeight=0.55mm, Manufacturer1 Example="NIC COMPONENT", Manufacturer1 Part Number=NRC06F2001TRF, Power=0.1W, Tolerance=±1%, Author="CERN DEM JLC", Component Type=Standard, CreateDate=03/12/2007, HelpURL=\\cern.ch\dfs\Applications\Altium\Datasheets\R0603_NIC_NRC.pdf, LatestRevisionDate=13/03/2008, Manufacturer Part Number=R0603_2K_1%_0.1W_100PPM, Part Description="General Purpose Thick Film Chip Resistor", Part Number=R0603_2K_1%_0.1W_100PPM, Pin Count=2, PressFit=No, Sense=No, SMD=Yes, Socket=No, Status=Preferred, TC=±100ppm/°C
  R3 R4 R20 R21 R22 R23 R24 R25 R26 R27 R32 R33 R34: Mounted=Yes
  R13 R14 R15 R16 R17 R18 R19 R28: ClassName=NotMounted, Mounted=No
TR3: library part XFMR_MINI-CIRCUITS_TCM2-43X+, "50 OHMS 10 to 4000 MHz RF Transformer", Manufacturer=MINI-CIRCUITS, Manufacturer Part Number=TCM2-43X+, Power=0.4W, Author="CERN DEM BC", ComponentHeight=4.06mm, Component Type=Standard, CreateDate=2016-02-12, HelpURL=\\cern.ch\dfs\Applications\Altium\Datasheets\XFMR_MINI-CIRCUITS_TCM2-43X+.pdf, LatestRevisionDate=2016-02-12, Mounted=Yes, Part Description="50 Ohms 10 to 4000MHz RF Transformer", Part Number=XFMR_MINI-CIRCUITS_TCM2-43X+, Pin Count=6, Sense=No, SMD=Yes, Socket=No, Status=None

## Free pads (board coordinates)
  round 137.8 on Mech9: 1(3500.98,2718.9) 1(12359.84,2718.9)
  round 78.74 on Mech9: 1(3894.68,2718.9) 1(11966.14,2718.9) 1(11966.14,7435.43)
  round 31.5 on Mech9: 1(3969.49,7045.28) 1(4018.7,7045.28) 1(4067.91,7045.28) 1(4117.13,7045.28) 1(4166.34,7045.28) 1(6134.84,3108.66) 1(6134.84,7045.67) 1(6184.06,3108.66) 1(6184.06,7045.67) 1(6233.27,3108.66) 1(6233.27,7045.67) 1(6282.48,3108.66) 1(6282.48,7045.67) 1(6331.69,3108.66) 1(6331.69,7045.67) 1(8300.2,3108.66) 1(8300.2,7045.67) 1(8349.41,3108.66) 1(8349.41,7045.67) 1(8398.62,3108.66) 1(8398.62,7045.67) 1(8447.83,3108.66) 1(8447.83,7045.67) 1(8497.05,3108.66) 1(8497.05,7045.67) 1(10465.55,3108.66) 1(10465.55,7045.67) 1(10514.76,3108.66) 1(10514.76,7045.67) 1(10563.98,3108.66) 1(10563.98,7045.67) 1(10613.19,3108.66) 1(10613.19,7045.67) 1(10662.4,3108.66) 1(10662.4,7045.67)
  round 236.22 hole 125.98: 2(9746.26,3344.49) 3(9746,6809)

## Via types
v1: diameter 15.75, hole 7.87, TopLayer to BottomLayer, tented both sides, 56 vias
v2: diameter 25.59, hole 11.81, TopLayer to BottomLayer, tented both sides, 19 vias
v3: diameter 11.81, hole 3.94, TopLayer to BottomLayer, tented both sides, 1 vias

## Nets (pads, with @x,y where several pads share a name; then routed paths per layer and width w, separated by ;. In a path a pad name is that pad's centre, name@x,y a point inside that pad or via, vN(x,y) a via of type N, cw(c..) or ccw(c..) an arc to the next point about the centre after c; other vN are vias at no path point)
BUS_SCL: IC1.1 IC1.4 IC5.1 IC5.4 IC7.12 J26.B2 | length 2747.6
  TopLayer w5: IC1.1@11043.84,5211.03 11087.03,5211.03 11105,5229 v1(11105,5287.8) ; IC1.4@11043.84,5287.8 v1(11105,5287.8) ; IC5.1@11043.84,5545.68 11095.68,5545.68 11105,5555 11105,5613.06 11095.61,5622.45 IC5.4@11043.84,5622.45 ; v1(11245,5259) 11216.2,5287.8 v1(11105,5287.8) ; v1(11305,5258) 11305.06,5258.06 IC7.12@11414.91,5258.06
  MidLayer2 w5: v1(11105,5287.8) 11071,5321.8 11071,5541 v1(11107,5577) 11135,5605 11135,6132 11512,6509 12080.12,6509 J26.B2@12124.39,6553.27 ; v1(11245,5259) 11246,5258 v1(11305,5258)
BUS_SDA: IC1.8 IC1.11 IC5.8 IC5.11 IC7.13 J26.C2 | length 3060.3
  TopLayer w5: IC1.11@10810.69,5283 IC1.11@10815.5,5287.8 10854.8,5287.8 10860,5293 10860,5355 10852,5363 10817.07,5363 IC1.8@10815.5,5364.57 ; IC5.11@10815.5,5622.45 10860.47,5622.45 10866,5627.98 v1(10866,5662) 10866,5685 10851.78,5699.22 IC5.8@10815.5,5699.22 ; v1(10922,5226) 10981.01,5166.99 11109.99,5166.99 11173.69,5230.69 v1(11245.14,5230.69) ; v1(11304,5230) 11306.47,5232.47 IC7.13@11414.91,5232.47
  MidLayer2 w5: v1(10860.36,5310.74) 10860.36,5287.64 v1(10922,5226) ; v1(10866,5662) 10866,5916 11470,6520 12036,6520 J26.C2@12069.27,6553.27 ; v1(11245.14,5230.69) 11245.83,5230 v1(11304,5230)
  SignalLayer1 w5: v1(10860.36,5310.74) 10860.36,5644.47 10866,5650.11 v1(10866,5662)
CK_MMCX_IN_N: C195.1 J26.F4 TR3.4 | length 1545.5
  TopLayer w3.74: TR3.4@10531.22,6569.64 10531.29,6569.71 10589.49,6569.71 C195.1@10598.84,6579.06 10601.01,6579.06 10617.64,6562.43 10617.64,6526.73 10619.83,6524.54 10626.52,6524.54 11148.29,6524.54 11301.29,6677.54 11909.26,6677.54 11927.14,6695.42 11927.14,6698.52 11924.95,6700.71 11924.66,6700.71 11914.62,6710.75 J26.F4@11903.91,6710.75
CK_MMCX_IN_P: C191.2 J26.E4 TR3.6 | length 1559.4
  TopLayer w3.74: TR3.6@10531.22,6469.64 10590.55,6469.64 C191.2@10598.84,6461.35 10601.01,6461.35 10617.64,6477.98 10617.64,6513.68 10619.83,6515.87 11151.87,6515.87 11304.88,6668.88 11912.85,6668.88 11935.8,6691.83 11935.8,6698.52 11937.99,6700.71 11938.29,6700.71 11948.32,6710.75 J26.E4@11959.03,6710.75
DIS_I2C0: IC1.5 IC1.6 IC1.12 IC1.13 IC7.1 R3.1 | length 1036.6
  TopLayer w5: IC1.13@10815.5,5236.62 10854.62,5236.62 10866,5248 10866,5262.21 ; IC1.12@10815.5,5262.21 10866,5262.21 ; IC1.5@11043.84,5313.39 10991,5313.39 ; R3.1@11434.51,5620.17 11434.51,5596.49 11464,5567 11464,5544 11459.56,5539.56 IC7.1@11414.91,5539.56 11219.56,5539.56 11138,5458 11138,5366 11110.98,5338.98 IC1.6@11043.84,5338.98 11004.98,5338.98 10991,5325 10991,5313.39 ; 10866,5262.21 10910.21,5262.21 10961.39,5313.39 10991,5313.39
DIS_I2C1: IC5.5 IC5.6 IC5.12 IC5.13 IC7.2 R4.1 | length 1040.6
  TopLayer w5: IC5.13@10815.5,5571.27 10856.27,5571.27 10870,5585 10870,5596.86 ; IC5.12@10815.5,5596.86 10870,5596.86 ; IC5.6@11043.84,5673.63 11160.37,5673.63 11185,5649 11464.73,5649 R4.1@11493.57,5620.17 11493.57,5538.57 11468.97,5513.97 IC7.2@11414.91,5513.97 ; 11099,5673.63 11098,5672.63 11098,5654 11092.04,5648.04 IC5.5@11043.84,5648.04 10928.04,5648.04 10876.86,5596.86 10870,5596.86
GA0: IC7.15 J26.C3 R33.1 | length 2332.2
  TopLayer w5: v1(11346,6367) 11346,6020.24 v1(11480.24,5886) ; R33.1@11633,5112.5 11633,5193 11646.88,5206.88 IC7.15@11690.5,5206.88
  MidLayer2 w5: v1(11480.24,5886) 11480.24,5376.76 11554,5303 11554,5194.79 11592.79,5156 v1(11632,5156)
  BottomLayer w5: v1(11346,6367) 11346,6363 11545.51,6562.51 11545.51,6564.74 11561.73,6580.96 11563.96,6580.96 11578,6595 12028.32,6595 J26.C3@12065.33,6632.01
GA1: IC7.16 J26.F3 R34.1 | length 2087.1
  TopLayer w5: R34.1@11572.31,5112.29 11572.31,5185.31 11619.47,5232.47 IC7.16@11690.5,5232.47 ; v1(11601,5927) 11536.87,5927 11482,5981.87 11482,6558 11512,6588 11855.97,6588 J26.F3@11899.98,6632.01 ; v1@11604,5798 11604,5313 v1(11606,5311)
  MidLayer2 w5: v1(11601,5927) 11601,5904 11606,5899 v1(11606,5798)
  BottomLayer w5: v1(11606,5220) v1(11606,5311)
GA2: IC7.17 J26.H3 R32.1 | length 2053
  TopLayer w5: R32.1@11513.25,5112.29 11513.25,5176.25 11607.5,5270.5 ; v1(11585,5900) 11519,5900 11450,5969 11450,6568 11482,6600 11757.73,6600 J26.H3@11789.74,6632.01 ; v1(11586,5809) 11586,5292 11607.5,5270.5 ; IC7.17@11690.5,5258.06 11619.94,5258.06 11607.5,5270.5
  MidLayer2 w5: v1(11585,5900) 11586,5899 v1(11586,5809)